# EAGLE board innocomm-sigfox-breakout (EAGLE 9.1.0)
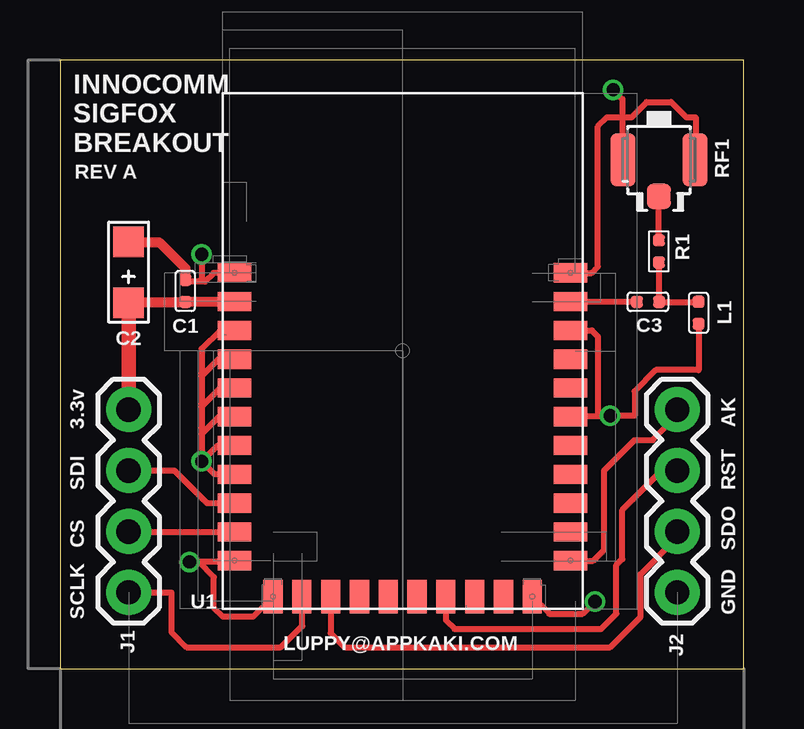
[diagram p0: board, top side]
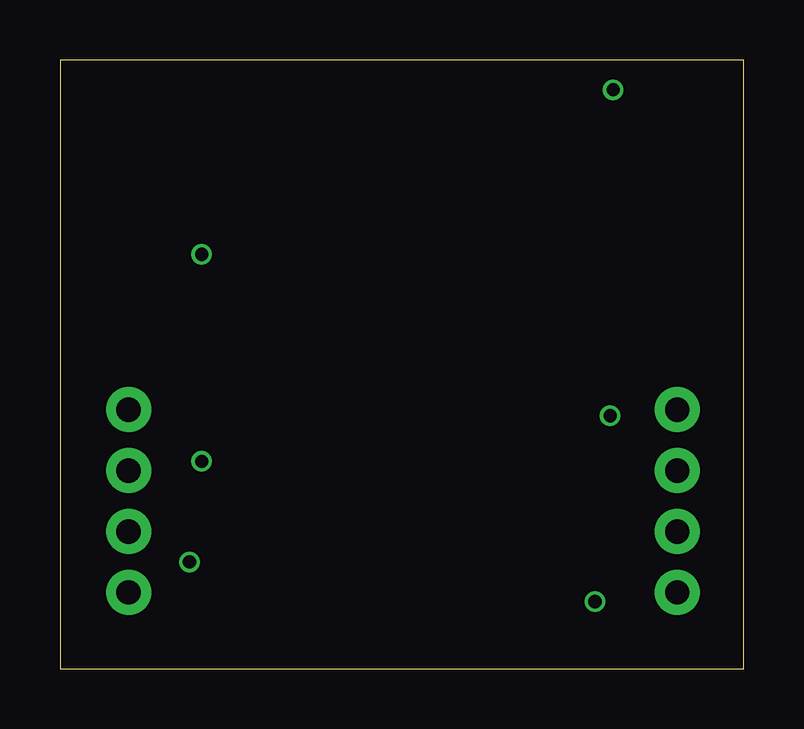
[diagram p1: board, inner layer Route2]
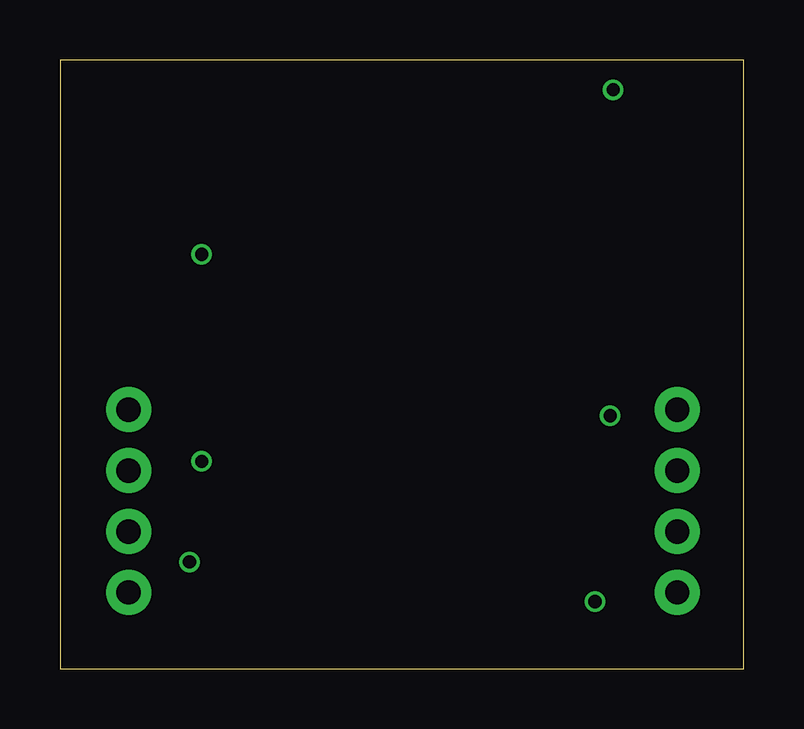
[diagram p2: board, inner layer Route15]
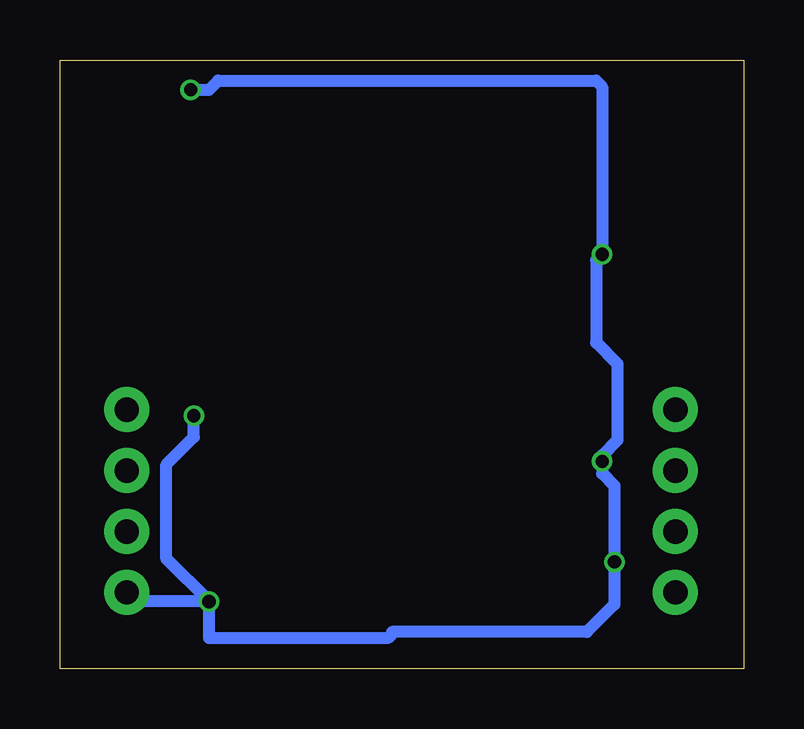
[diagram p3: board, bottom side, seen from below]

Size 28.5 x 25.38 mm. Coordinates in mm from the lower left corner, seen from the top.
Outline: 0,0 28.5,0 28.5,25.38 0,25.38 0,0
Copper layers (1*16): Top 0.035mm / dielectric 1.5mm / Bottom 0.035mm
Design rules "SeeedStudio_2layer_DRU_no_angle_20140221": minimum track width 6mil, minimum drill 12mil, track to track 6mil, track to pad 6mil, pad to pad 6mil, via to via 6mil, smd to smd 0mil, copper to edge 10mil, drill to drill 10mil, minimum pad ring 10mil, minimum via ring 6mil, stop-mask expansion 2mil, vias tented up to drill 100mil, thermal gap 10mil

## Footprints (pad centres in the part's own frame; a part is rotated, then mirrored left to right if it is on the bottom)
C0402 = smd 0.5 x 0.5: 1 0,0.463; 2 0,-0.463
AVX-A = smd 1.27 x 1.27: + -1.27,0; - 1.27,0
1X04 = drill 1.016 pad 1.88: 1 0,0; 2 2.54,0; 3 5.08,0; 4 7.62,0
L0402 = smd 0.5 x 0.5: 1 -0.463,0; 2 0.463,0
R0402 = smd 0.5 x 0.5: 1 0,0.463; 2 0,-0.463
U-FL3P-SMD-2.6X2.6X1.0MM = smd 1.05 x 1: D -1.524,0 | smd 2.2 x 1.05: GND1 0,1.5; GND2 0,-1.5
INNOCOMM-SN10-12 = smd 1.4 x 0.8: 1 0.5,14; 2 0.5,12.8; 3 0.5,11.6; 4 0.5,10.4; 5 0.5,9.2; 6 0.5,8; 7 0.5,6.8; 8 0.5,5.6; 9 0.5,4.4; 10 0.5,3.2; 11 0.5,2; 22 14.5,2; 23 14.5,3.2; 24 14.5,4.4; 25 14.5,5.6; 26 14.5,6.8; 27 14.5,8; 28 14.5,9.2; 29 14.5,10.4; 30 14.5,11.6; 31 14.5,12.8; 32 14.5,14 | smd 0.8 x 1.4: 12 2.1,0.5; 13 3.3,0.5; 14 4.5,0.5; 15 5.7,0.5; 16 6.9,0.5; 17 8.1,0.5; 18 9.3,0.5; 19 10.5,0.5; 20 11.7,0.5; 21 12.9,0.5

## Placement (x,y rotation side)
BREADBRD1  BREADBOARD_PATTERN  [BREADBOARD_SPACING]  14.29,-5.5 0 top  (outside the outline)
C1  33pf / CC0402JRNPO9BN330 / 302010000  [C0402]  5.22,15.75 0 top
C2  47uf / TAJC476K006RNJ / 302020005  [AVX-A]  2.86,16.53 90 top
C3  100pf / CC0402JRNPO9BN101 / 302010012  [C0402]  24.5,15.3 90 top
J1  4 x Plated Holes  [1X04]  2.86,3.18 90 top
J2  4 x Plated Holes  [1X04]  25.72,3.18 90 top
L1  47NH / LQW15AN47NJ00D / 303010107  [L0402]  26.61,14.84 270 top
R1  0R / RC0402JR-070RL / 301010000  [R0402]  24.96,17.4 180 top
RF1  U-FL / ??? / 320110048  [U-FL3P-SMD-2.6X2.6X1.0MM]  24.96,21.21 90 top
U1  SN10-12  [INNOCOMM-SN10-12]  6.78,2.5 0 top

## Library data of the parts
BREADBRD1 = SparkFun-Aesthetics
C1 = Seeed-Capacitor; DESCRIPTION: SMD CAP Ceramic 33pF-50V-5%-NPO; MANUFACTURER: YAGEO; MPN: CC0402JRNPO9BN330; SKU: 302010000
C2 = Seeed-Capacitor; DESCRIPTION: SMD CAP Tantalum 47uF-6.3V; MANUFACTURER: AVX; MPN: TAJC476K006RNJ; SKU: 302020005
C3 = Seeed-Capacitor; DESCRIPTION: SMD CAP Ceramic 100pF-50V-5%-NPO; MANUFACTURER: YAGEO; MPN: CC0402JRNPO9BN101; SKU: 302010012
J1 J2 = SparkFun-Connectors; PROD_ID: CONN-09696
L1 = Seeed-Inductor; DESCRIPTION: SMD Inductor;47nH-5%-210mA-0402; MANUFACTURER: Murata; MPN: LQW15AN47NJ00D; SKU: 303010107
R1 = Seeed-Resistor; DESCRIPTION: SMD RES 0R-5%-1/16W; MANUFACTURER: YAGEO; MPN: RC0402JR-070RL; SKU: 301010000
RF1 = Seeed-Connector; DESCRIPTION: SMD U-FL Female CONN-Gold;3P-L2.6*W2.6*H1.25mm; MANUFACTURER: I-PEX; SKU: 320110048
U1 = innocomm-sigfox-breakout; DESCRIPTION: SIGFOX module for Zone 2 / Zone 4; MANUFACTURER: InnoComm; MPN: SN10-12; URL: https://www.arrow.com/zh-cn/products/sn10-12/innocomm-mobile-technology-corporation

## Nets
3V3: C1.2 C2.+ J1.4 U1.2
ANT: C3.1 U1.31
ESD: C3.2 L1.1 R1.1
GND: C1.1 C2.- J2.1 L1.2 RF1.GND1 RF1.GND2 U1.1 U1.3 U1.4 U1.5 U1.6 U1.7 U1.8 U1.11 U1.12 U1.21 U1.27 U1.30 U1.32
RF: R1.2 RF1.D
RST_N: J2.3 U1.18
SPI_AK: J2.4 U1.22
SPI_CS: J1.2 U1.10
SPI_SCLK: J1.1 U1.13
SPI_SDI: J1.3 U1.9
SPI_SDO: J2.2 U1.14

## Tracks (layer width: path | path; a pad name or v marks a point on that pad's centre or on a via)
3.3V
  pour Route15: 32.64,37.98 54.23,37.98 54.23,27.18 32.64,27.18
3V3
  Top 0.254: C1.2 5.23,15.3 | C2.+ 2.88,15.29
  Top 0.406: 2.88,15.29 C1.2 | 5.23,15.3 U1.2
  Top 0.61: J1.4 C2.+
ANT
  Top 0.254: U1.31 C3.1
ESD
  Top 0.254: R1.1 C3.2 L1.1
GND  (via drill 0.55)
  Top 0.254: 2.8,17.79 C2.- | U1.30 22.16,14.1 22.42,13.85 22.42,10.55 | L1.2 26.61,12.45 24.83,12.45 23.94,11.56 23.94,10.55 v22.92,10.55 22.42,10.55 | U1.11 7.23,4.45 v5.4,4.45 5.78,4.45 6.41,3.81 6.41,2.54 6.79,2.16 8.04,2.16 U1.12 | U1.8 6.44,8.1 v5.91,8.64 | U1.3 6.67,14.1 5.91,13.34 5.91,12.32 5.91,12.2 | 5.91,12.2 5.91,11.05 5.91,10.93 | 5.91,10.93 5.91,10.04 5.91,9.78 | 5.91,9.78 5.91,8.77 v5.91,8.64 | U1.1 6.4,16.5 6.03,16.13 | 6.03,16.13 5.3,16.13 C1.1 | v5.91,17.28 5.91,16.26 6.03,16.13 | U1.32 22.15,16.5 22.42,16.77 22.42,22.61 22.8,22.99 23.43,22.99 | 23.43,22.99 23.81,22.99 24.45,23.63 25.46,23.63 26.1,22.99 26.48,22.99 26.48,21.24 RF1.GND2 | RF1.GND1 23.46,22.97 23.43,22.99 | v23.05,24.14 23.43,23.75 23.43,22.99 | U1.4 6.61,12.9 5.91,12.2 | U1.5 6.68,11.7 5.91,10.93 | U1.6 6.62,10.5 5.91,9.78 | U1.7 6.57,9.3 v5.91,8.64 | U1.21 20.38,2.3 20.38,2.29 21.78,2.29 v22.29,2.8 | U1.27 21.32,10.55 22.42,10.55
  Top 0.406: 2.8,17.79 4.13,17.79 5.22,16.69 C1.1
  Bottom 0.508: v23.05,24.14 22.29,24.14 21.91,24.52 6.16,24.52 5.91,24.26 v5.91,17.28 6.16,17.02 6.16,13.59 5.27,12.71 5.27,9.53 5.91,8.89 v5.91,8.64 5.91,8.13 5.4,7.62 v5.4,4.45 5.4,2.67 6.54,1.53 14.67,1.53 arc90 14.92,1.27 22.29,1.27 v22.29,2.8 | v22.29,2.8 25.34,2.8 J2.1 | v22.29,2.8 24.07,4.58 24.07,8.51 22.92,9.66 v22.92,10.55
  pour Route2: 32.64,27.18 54.23,27.18 54.23,52.58 32.64,52.58
RF
  Top 0.254: R1.2 RF1.D
RST_N
  Top 0.254: U1.18 16.08,2.02 16.45,1.66 22.54,1.66 23.18,2.29 23.18,4.32 23.43,4.58 23.43,6.61 25.08,8.26 J2.3
SPI_AK
  Top 0.254: U1.22 22.21,4.5 22.67,4.96 22.67,8.26 23.94,9.53 24.7,9.53 25.72,10.55 J2.4
SPI_CS
  Top 0.254: J1.2 2.88,5.7 U1.10
SPI_SCLK
  Top 0.254: U1.13 10.1,2.98 10.1,1.78 9.21,0.89 5.27,0.89 4.64,1.53 4.64,3.18 J1.1
SPI_SDI
  Top 0.254: J1.3 4.76,8.26 6.12,6.9 U1.9
SPI_SDO
  Top 0.254: U1.14 11.28,1.49 11.87,0.89 22.92,0.89 24.19,2.16 24.19,3.94 25.72,5.47 J2.2

## Text on the board
tPlace: INNOCOMM / SIGFOX / BREAKOUT | REV A | 3.3v | AK | RST | SDI | CS | SDO | SCLK | GND | LUPPY@APPKAKI.COM